# Altium PCB Sim548Z-v4.PcbDoc
Units mil, origin at the board's own origin, x right, y up, seen from the top; angles counter-clockwise.
Board outline 3100 x 1765 mil, 2 copper layers (Top Layer, Bottom Layer); 43 components, 0 nets, 252 pads, 53 vias.
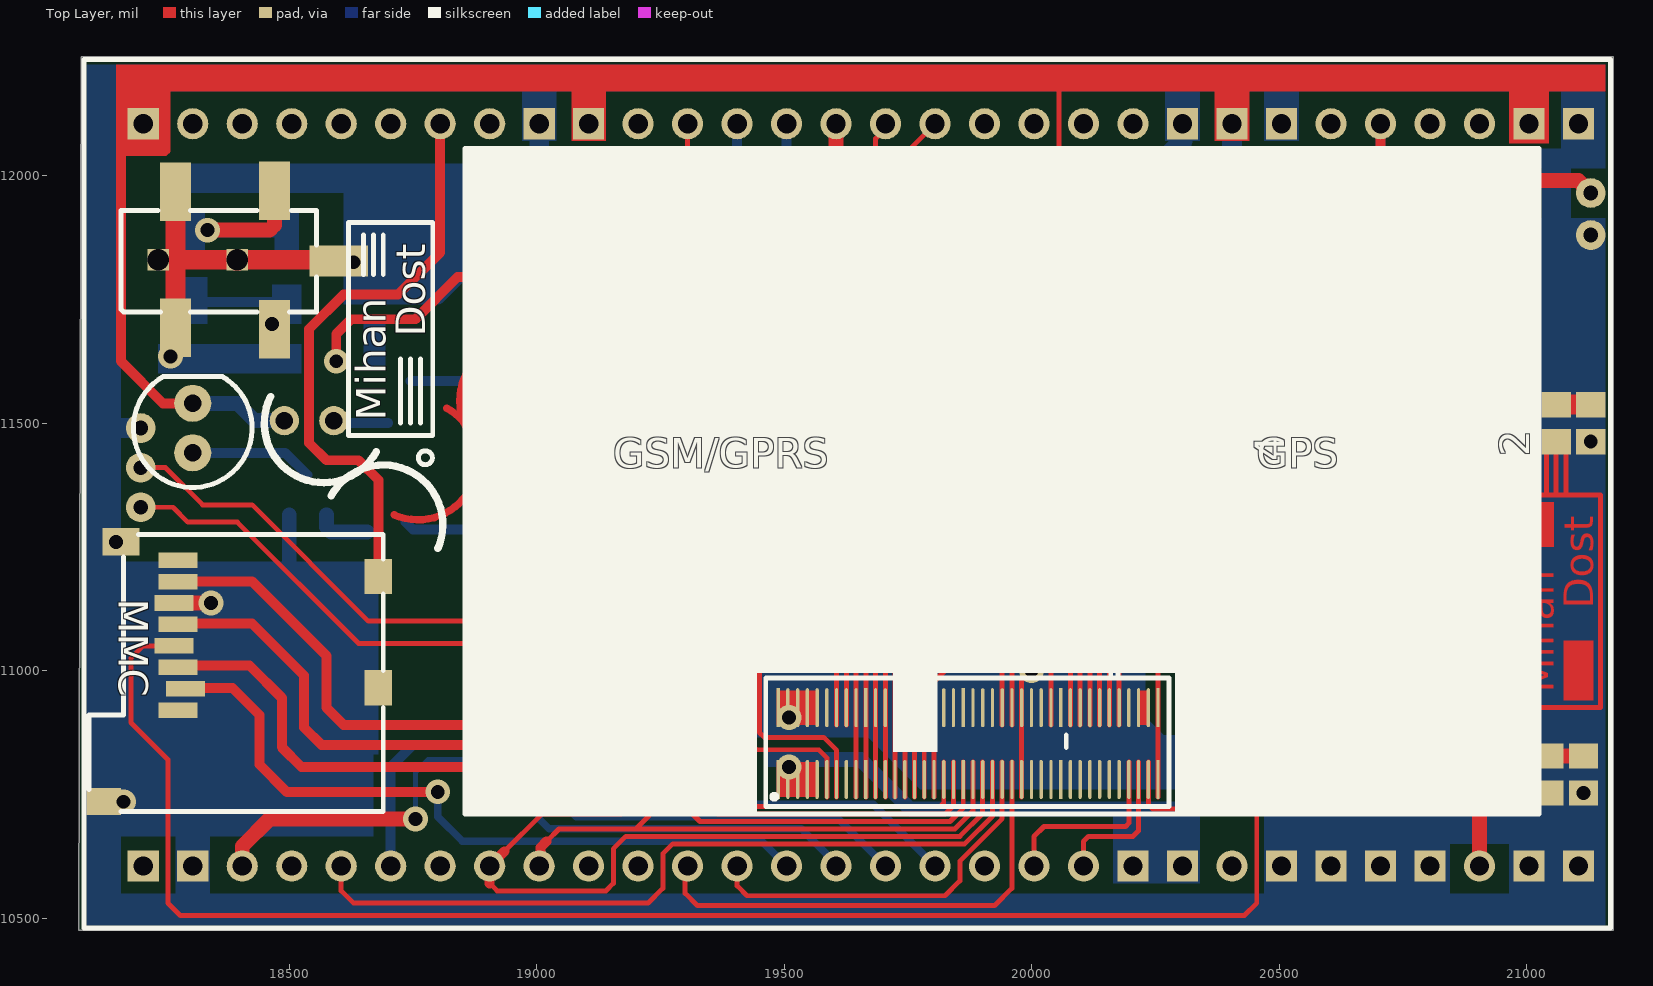
[diagram p0: Top Layer view]
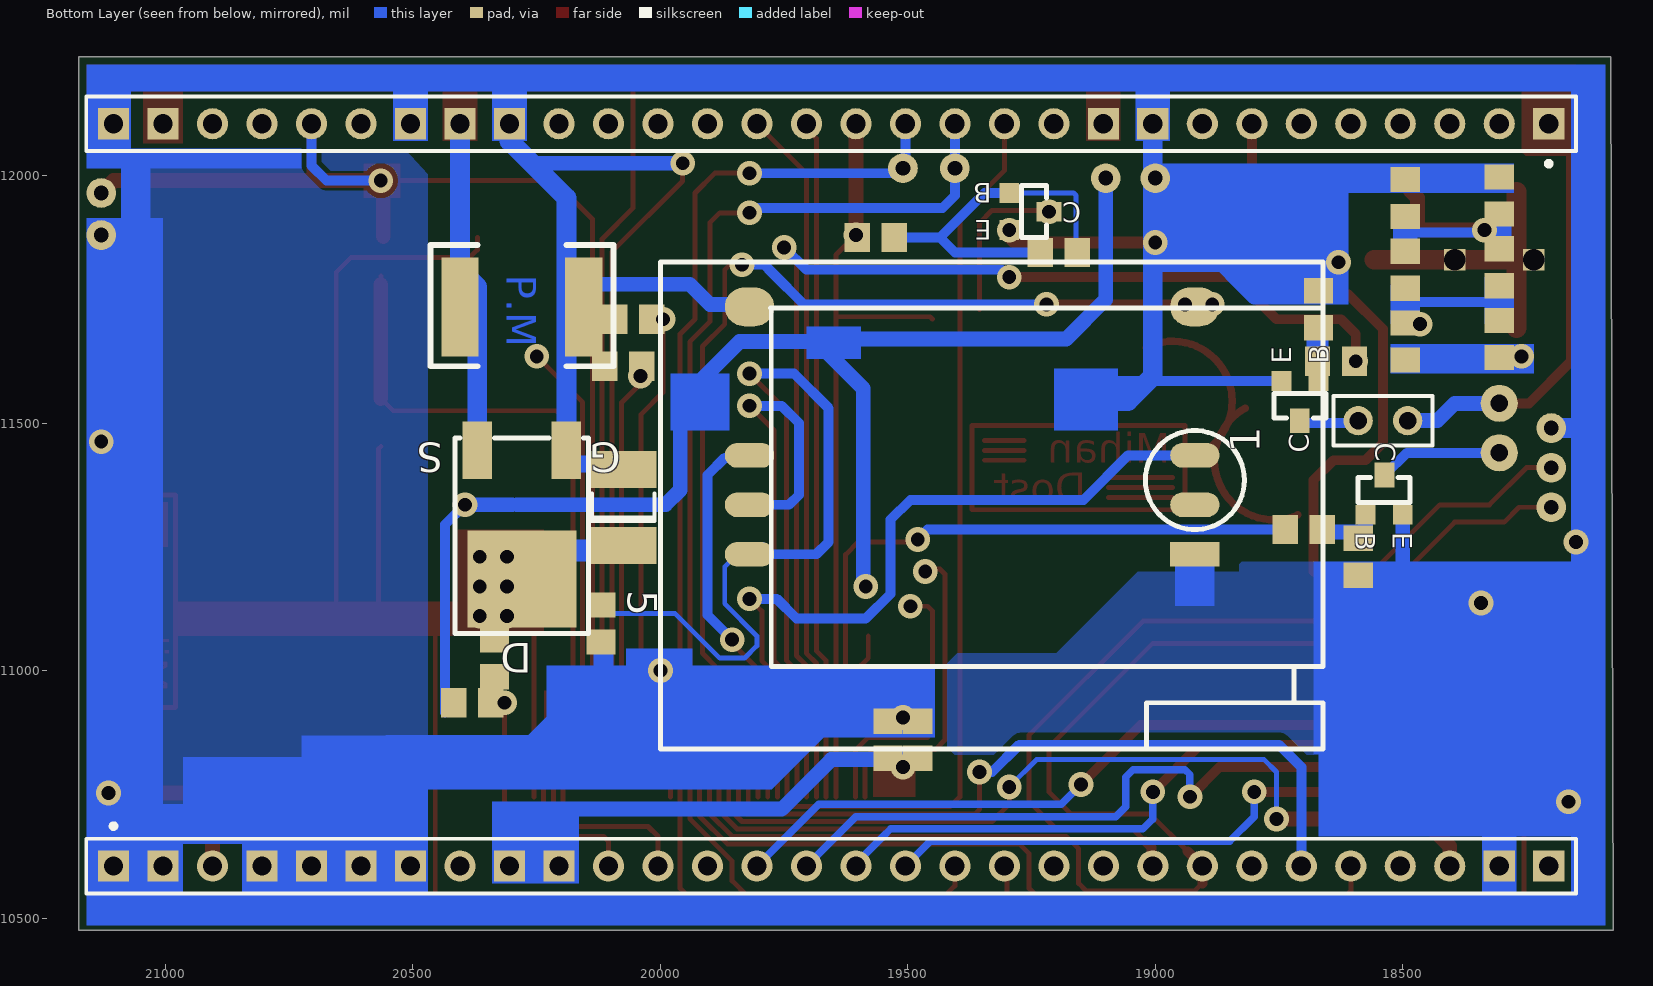
[diagram p1: Bottom Layer view, seen from below]

## Layer stack, top to bottom
Top Layer: signal copper 1.4
Dielectric: dielectric 12.6, FR-4, Dk 4.8
Bottom Layer: signal copper 1.4

## Board outline
18080,12240 21175,12240 21175,10475 18075,10475

## Design rules (kind name [scope] priority, off if disabled: settings)
Clearance [All] p1: gap=10
PolygonConnect [All] p1: connectstyle=Relief reliefconductorwidth=10 reliefentries=4 polygonreliefangle="90 Angle"
RoutingVias [All] p1: holewidth=28 width=50 viastyle="Through Hole" minholewidth=28 minwidth=50 maxholewidth=28 maxwidth=50
SilkscreenOverComponentPads [All] p1: minsilkscreentomaskgap=10
SolderMaskExpansion [All] p1: expansion=4
Width [All] p1: maxlimit=10 minlimit=10 preferedwidth=10
27 further rules are at their usual default settings.

## Components (designator, comment, footprint, x,y, rotation, side; value= is the part's Value field where it differs from the comment)
1 "Comment" SMD-tr 18670,11585 r90 bottom
2 "Comment" 2012[0805] 21060,11500 r270 top
4 "Comment" 2012[0805] 20565,11490 r90 top
5 "Comment" 2012[0805] 20120,11095 r90 bottom
HEADPHONE1 "" "Phone Jack" 18235,11830 r90 top
? "Comment" 2012[0805] 20370,11925 r90 top
? "Comment" SIM548Z 19890,11145 r0 top
? "Comment" "SIM card holder" 18900,11725 r0 bottom
? "Comment" 2012[0805] 18590,11230 r270 bottom
? "Comment" 2012[0805] 19575,11120 r90 top
? "Comment" 2012[0805] 20565,11835 r90 top
? "Comment" 2012[0805] 18700,11285 r180 bottom
? "Comment" SMD-tr 18575,11315 r270 bottom
? "Comment" 2012[0805] 18495,11955 r270 bottom
? "Comment" 2012[0805] 18495,11810 r270 bottom
? "Comment" 2012[0805] 18495,11665 r270 bottom
? "Comment" 2012[0805] 18305,11670 r270 bottom
? "Comment" 2012[0805] 18305,11815 r270 bottom
? "Comment" 2012[0805] 18305,11960 r270 bottom
? "Comment" 2012[0805] 21045,10790 r270 top
? "Comment" 2012[0805] 21115,10790 r270 top
? "Comment" 1812 20075,11330 r90 bottom
? "Comment" 2012[0805] 20055,11710 r180 bottom
? "Comment" 2012[0805] 20380,10935 r0 bottom
? "Comment" 2012[0805] 20335,11025 r270 bottom
? "Comment" 2012[0805] 20075,11615 r180 bottom
? "Comment" 2220 20155,11735 r0 bottom
? "Comment" 2012[0805] 19480,10860 r90 bottom
? "Comment" 2012[0805] 19540,10860 r90 bottom
? "Comment" LED1 18325,11450 r90 top
? "Comment" HDR1X30#1 21105,10605 r180 bottom
? "Comment" HDR1X30#2 18205,12105 r0 bottom
? "Comment" MicroSD 18275,10920 r90 top
? "Comment" DPAK 20290,11245 r0 bottom
? "Comment" 2012[0805] 18635,11625 r180 bottom
? "Comment" 2012[0805] 18670,11730 r270 bottom
? "Comment" HDR1X2 18490,11505 r0 bottom
? "Comment" 2012[0805] 21130,11500 r270 top
? "Comment" 2012[0805] 19565,11875 r180 bottom
? "Comment" SMD-tr 19295,11965 r0 bottom
? "Comment" 2012[0805] 19195,11845 r0 bottom
? "Comment" 3216[1206] 19395,11710 r180 top
? "Comment" "Arman Afzar" 21120,10945 r90 top

## Footprints (in the part's own frame and the unit in brackets; to place one, negate y for a bottom-side part, rotate by r counter-clockwise, add the part's x,y. Pads: shape width x height; smd on the part's side, far side on the other; paste and mask are expansions set on the pad)
1812 [mm] "Chip Capacitor; Body 4.5 x 3.2 mm (LxW typ)"
  rect 1.9x3.4 smd: 1(-1.95,0) 2(1.95,0)
  silkscreen extent -0.7,-1.6 0.7,1.6
2012[0805] [mm] "Chip Resistor; Body 2.0 x 1.3 mm (LxW typ)"
  rect 1.3x1.5 smd: 1(-0.95,0) 2(0.95,0)
2220 [mil]
  rect 75x200 smd: GND(0,0) VCC(250,0)
  silkscreen extent -60,-125 310,120
3216[1206] [mm] "Chip Resistor; Body 3.2 x 1.6 mm (LxW typ)"
  rect 1.6x1.8 smd: 1(-1.4,0) 2(1.4,0)
  silkscreen extent -0.3,-0.8 0.3,0.8
"Arman Afzar" [mil]
  Top Layer region: 304.91,64.98 304.91,124.71 394.71,124.71 394.71,64.98
  Top Layer region: -4.71,-14.71 -4.71,45 115,45 115,-14.71
  Top Layer lines w10: -20,140 -20,-30 410,-30 410,140 -20,140
DPAK [mil]
  rect 60x116 smd: 1(-100,-200) 3(80,-200)
  rect 220x196 smd: 2(-10,60)
  silkscreen extent -145,-225 125,170
HDR1X2 [mm] "Connector; Header; 2 Position"
  round 1.5 hole 0.9: 1(0,0) 2(2.54,0)
  silkscreen extent -1.27,-1.27 3.81,1.27
HDR1X30#1 [mm] "Connector; Header; 30 Position"
  round 1.6 hole 0.99: CTS(43.18,0) DCD(60.96,0) DSR(58.42,0) DTR(68.58,0) LED-POWER(5.08,0) MISO(33.02,0) MOSI(35.56,0) OC1B(25.4,0) OCO(30.48,0) OCR1A(27.94,0) RING(45.72,0) RST(17.78,0) RTS(63.5,0) RX(55.88,0) RXD(48.26,0) SCK(38.1,0) SS(40.64,0) TX(53.34,0) TXD(66.04,0) XCK(50.8,0)
  rect 1.6x1.6 hole 0.99: GND(0,0) GND(2.54,0) GND(7.62,0) GND(10.16,0) GND(12.7,0) GND(15.24,0) GND(71.12,0) VCC(20.32,0) VCC(22.86,0) VCC(73.66,0)
  silkscreen extent -1.4,-1.4 75.06,2.17
HDR1X30#2 [mm] "Connector; Header; 30 Position"
  rect 1.6x1.6 hole 0.99: ADC0(0,0) GND(20.32,0) GND(53.34,0) GND(58.42,0) GND(73.66,0) VCC(22.86,0) VCC(55.88,0) VCC(71.12,0)
  round 1.6 hole 0.99: ADC1(2.54,0) ADC2(5.08,0) ADC3(7.62,0) ADC4(10.16,0) ADC5(12.7,0) ADC6(15.24,0) ADC7(17.78,0) PA.3(43.18,0) PA.4(40.64,0) PA.5(38.1,0) PA.6(35.56,0) PC0(50.8,0) PC1(48.26,0) PC2(45.72,0) PC4(33.02,0) PC5(30.48,0) PC6(27.94,0) PC7(25.4,0) RXD(63.5,0) SCL(68.58,0) SDA(66.04,0) TXD(60.96,0)
  silkscreen extent -1.4,-1.4 75.06,2.17
LED1 [mil]
  round 75 hole 35: 1(-10,20) 2(90,20)
  silkscreen extent -80,-100 144,140
MicroSD [mm]
  rect 0.8x2 smd: 1(0,0) 2(1.1,-0.4) 3(2.2,0) 4(3.3,0.2) 5(4.4,0) 6(5.5,0.2) 7(6.6,0) 8(7.7,0)
  rect 1.4x1.9 smd: 9(8.643,2.918)
  rect 1.8x1.4 smd: 10(6.865,-10.29) 11(1.15,-10.29)
  rect 1.4x1.75 smd: 12(-4.692,3.807)
  silkscreen extent -5.21,-10.54 9.02,4.57
"Phone Jack" [mm]
  rect 1.1x1.1 hole 1.1: 0(0,0) 0(0,-4.064)
  rect 3x1.6 smd: 1(-3.492,-0.889) 2(-3.556,-5.969) 4(3.556,-5.969) 5(3.492,-0.889)
  rect 1.6x3 smd: 3(-0.064,-9.271)
  silkscreen extent -2.67,-8.13 2.54,1.91
SIM548Z [mm] "GSM&GPS"
  rect 0.17x2 smd: 1(-10.214,-9.271) 2(-10.214,-5.588) 19(-5.714,-9.271) 20(-5.714,-5.588) 39(-0.714,-9.271) 40(-0.714,-5.588) 59(4.286,-9.271) 60(4.286,-5.588) 79(9.286,-9.271) 80(9.286,-5.588)
  oval 0.17x2 smd: 3(-9.714,-9.271) 4(-9.714,-5.588) 5(-9.214,-9.271) 6(-9.214,-5.588) 7(-8.714,-9.271) 8(-8.714,-5.588) 9(-8.214,-9.271) 10(-8.214,-5.588) 11(-7.714,-9.271) 12(-7.714,-5.588) 13(-7.214,-9.271) 14(-7.214,-5.588) 15(-6.714,-9.271) 16(-6.714,-5.588) 17(-6.214,-9.271) 18(-6.214,-5.588) 21(-5.214,-9.271) 22(-5.214,-5.588) 23(-4.714,-9.271) 24(-4.714,-5.588) 25(-4.214,-9.271) 26(-4.214,-5.588) 27(-3.714,-9.271) 28(-3.714,-5.588) 29(-3.214,-9.271) 30(-3.214,-5.588) 31(-2.714,-9.271) 32(-2.714,-5.588) 33(-2.214,-9.271) 34(-2.214,-5.588) 35(-1.714,-9.271) 36(-1.714,-5.588) 37(-1.214,-9.271) 38(-1.214,-5.588) 41(-0.214,-9.271) 42(-0.214,-5.588) 43(0.286,-9.271) 44(0.286,-5.588) 45(0.786,-9.271) 46(0.786,-5.588) 47(1.286,-9.271) 48(1.286,-5.588) 49(1.786,-9.271) 50(1.786,-5.588) 51(2.286,-9.271) 52(2.286,-5.588) 53(2.786,-9.271) 54(2.786,-5.588) 55(3.286,-9.271) 56(3.286,-5.588) 57(3.786,-9.271) 58(3.786,-5.588) 61(4.786,-9.271) 62(4.786,-5.588) 63(5.286,-9.271) 64(5.286,-5.588) 65(5.786,-9.271) 66(5.786,-5.588) 67(6.286,-9.271) 68(6.286,-5.588) 69(6.786,-9.271) 70(6.786,-5.588) 71(7.286,-9.271) 72(7.286,-5.588) 73(7.786,-9.271) 74(7.786,-5.588) 75(8.286,-9.271) 76(8.286,-5.588) 77(8.786,-9.271) 78(8.786,-5.588)
  silkscreen extent -26.29,-11.05 28.83,23.11
"SIM card holder" [mil]
  oval 100x50 smd: 6(20,390) CLK(3)(920,290) DATA(7)(20,290) RST(2)(920,390) VDD(1)(920,490)
  oval 100x78.74 smd: GND(920,-10) LOCK(20,-10)
  rect 100x50 smd: GND(5)(20,490)
  silkscreen extent -239,-101 1100,884
SMD-tr [mil]
  rect 40x40 smd: 1(0,0) 2(0,75)
  rect 50x40 smd: 3(-80,38)
  silkscreen extent -75,-15 -25,90

## Part data
HEADPHONE1: library part "Header 5", "Header, 5-Pin"

## Free pads (board coordinates)
  round 60 hole 30: 0(18200,11410) 0(19000,11995) 0(19100,11995) 0(19405,12015) 1(18200,11330) 1(19510,12015) 1(21130,11965) 2(18200,11490) 2(21130,11880)

## Via types
v1: diameter 50, hole 28, Top Layer to Bottom Layer, 53 vias

## Nets (pads, with @x,y where several pads share a name; then routed paths per layer and width w, separated by ;. In a path a pad name is that pad's centre, name@x,y a point inside that pad or via, vN(x,y) a via of type N, cw(c..) or ccw(c..) an arc to the next point about the centre after c; other vN are vias at no path point)
pads on no net: 1.1 1.2 1.3 2.1 2.2 4.1 4.2 5.1 5.2 ?.1 ?.2 ?.3 ?.4 ?.5 ?.6 ?.7 ?.8 ?.9 ?.10 ?.11 ?.12 ?.13 ?.14 ?.15 ?.16 ?.17 ?.18 ?.19 ?.20 ?.21 ?.22 ?.23 ?.24 ?.25 ?.26 ?.27 ?.28 ?.29 ?.30 ?.31 ?.32 ?.33 ?.34 ?.35 ?.36 ?.37 ?.38 ?.39 ?.40 ?.41 ?.42 ?.43 ?.44 ?.45 ?.46 ?.47 ?.48 ?.49 ?.50 ?.51 ?.52 ?.53 ?.54 ?.55 ?.56 ?.57 ?.58 ?.59 ?.60 ?.61 ?.62 ?.63 ?.64 ?.65 ?.66 ?.67 ?.68 ?.69 ?.70 ?.71 ?.72 ?.73 ?.74 ?.75 ?.76 ?.77 ?.78 ?.79 ?.80 ?.ADC0 ?.ADC1 ?.ADC2 ?.ADC3 ?.ADC4 ?.ADC5 ?.ADC6 ?.ADC7 ?.CLK(3) ?.CTS ?.DATA(7) ?.DCD ?.DSR ?.DTR ?.GND ?.GND(5) ?.LED-POWER ?.LOCK ?.MISO ?.MOSI ?.OC1B ?.OCO ?.OCR1A ?.PA.3 ?.PA.4 ?.PA.5 ?.PA.6 ?.PC0 ?.PC1 ?.PC2 ?.PC4 ?.PC5 ?.PC6 ?.PC7 ?.RING ?.RST ?.RST(2) ?.RTS ?.RX ?.RXD ?.SCK ?.SCL ?.SDA ?.SS ?.TX ?.TXD ?.VCC ?.VDD(1) ?.XCK HEADPHONE1.0 HEADPHONE1.1 HEADPHONE1.2 HEADPHONE1.3 HEADPHONE1.4 HEADPHONE1.5
copper on no net: | length 75814.8
  Top Layer w10: 18160,12035 18170,12045 18200,12045 18250,12045 18255,12050 18255,12195 18260,12200 ; 18200,11330 18265,11330 18295,11300 18395,11300 18640,11055 19005,11055 19215,10845 19215,10755 19170,10710 19095,10710 19010,10710 18935,10635 ; 18200,11410 18250,11410 18325,11335 18425,11335 18660,11100 19025,11100 19255,10870 19255,10735 19200,10680 ; 18267.13,11049.92 18267.05,11050 18205,11050 18180,11025 18180,11020 18180,10895 18255,10820 18255,10530 18280,10505 20430,10505 20455,10530 20455,11110 ; 18280,11135 18281.54,11136.54 ; 18605,10605 18605,10555 18630,10530 19225,10530 19255,10560 19255,10630 19275,10650 19865,10650 19920.94,10705.94 19920.94,10815 ; 18705,10605 18710,10610 ; 18905,10570 18920,10555 19140,10555 19155,10570 19155,10640 19180,10665 19220,10665 19855,10665 19901.26,10711.26 19901.26,10815 ; 18965,11350 19095,11350 ; 18965,11370 19095,11370 ; 18965,11390 19095,11390 ; 19005,10605 19007.5,10607.5 ; 19020,10655 19045,10680 19845,10680 19881.58,10716.58 19881.58,10815 ; 19205,10605 19208.59,10608.59 ; v1(19215,11927) 19218,11930 19330,11930 19355,11905 19355,11730 ; 19265,11425 19345,11425 ; 19265,11445 19345,11445 ; 19265,11465 19345,11465 ; v1(19295,10765) 19295,10730 19330,10695 19835,10695 19861.89,10721.89 19861.89,10815 ; 19305,10605 19300,10600 19300,10550 19325,10525 19925,10525 19960,10560 19960,10635 19960,10655 19960,10675 19960,10815 ; 19305,12105 19305,12010 19395,11920 19395,11240 19395,10745 19415,10725 19815,10725 19822.52,10732.52 19822.52,10815 ; v1@19345,10795 19355,10785 19355,10720 19365,10710 19825,10710 19842.21,10727.2 19842.21,10815 ; 19405,10605 19405,10565 19425,10545 19825,10545 19855,10575 19855,10615 19940.63,10700.63 19940.63,10815 ; 19450.12,11710 19455.12,11715 19645,11715 ; v1@19460,11205 19435,11205 19425,11195 19425,10860 19445,10840 19570,10840 19586.3,10823.7 19586.3,10745 ; v1@19480,11270 19490,11260 19600,11260 19625.67,11234.33 19625.67,11009.33 19625.67,10890 ; v1(19495,11130) 19460,11130 19450,11120 19450,10875 19460,10865 19580,10865 19605.99,10839.01 19605.99,10745 ; 19580,11070 19580,11025 19605.99,10999.01 19605.99,10890 ; v1(19605,11880) 19645.35,11839.65 19645.35,10745 ; 19665.04,10745 19665.04,11020.04 19685,11040 19685,12075 19703.75,12093.75 19703.75,12105 ; 19684.72,10745 19684.72,11014.73 19705,11035 19705,12005 19805,12105 ; 19704.41,10745 19704.41,11009.41 19725,11030 19725,11830 v1(19750,11855) ; 19724.1,10745 19724.1,10999.09 19745,11020 19745,11525 v1(19820,11600) ; 19743.78,10745 19743.78,10993.78 19770,11020 19770,11485 v1(19820,11535) ; 19763.47,10745 19763.47,10988.47 19795,11020 19795,11120 v1(19820,11145) ; 19783.15,10745 19783.15,10983.15 19825,11025 v1@19855,11055 ; 19802.83,10745 19802.83,10977.83 19830,11005 19885,11005 19915,11035 19915,11655 19870,11700 19870,11810 19860,11820 v1(19835,11820) ; v1(19820,11925) 19880,11925 19900,11905 19900,11705 19940.63,11664.37 19940.63,10890 ; v1(19820,12005) 19890,12005 19930,11965 19930,11845 19930,11710 19960.31,11679.68 19960.31,10890 ; v1(19855,11062.5) v1@19855,11055 ; v1@19855,11070 v1@19855,11055 ; v1(19955,12025) 19955,11989.24 20098.11,11846.13 20098.11,10890 ; 19980,10745 19980,10960 19980,10980 v1(20000,11000) ; v1(19995,11710) 19995,11655 19995,11561.92 20039.06,11517.87 20039.06,10890 ; 20005,10605 20005,10665 20025,10685 20115,10685 ; v1(20040,11595) 20040,11580 20078.42,11541.58 20078.42,10890 ; 20055,12195 20055,12000 20055,11935 20117.79,11872.2 20117.79,10890 ; 20105,10605 20105,10655 20115,10665 20135,10665 20205,10665 20215,10675 20216.22,10676.22 20216.22,10815 ; 20105,10685 20190,10685 20196.53,10691.53 20196.53,10815 ; 20137.48,10890 20137.48,11387.48 20137.48,11912.48 20215,11990 v1(20565,11990) ; 20157.17,10890 20157.17,11362.17 20157.17,11542.17 v1(20250,11635) ; 20176.85,10890 20176.85,11491.85 20210,11525 20540,11525 20565,11550 ; 20235.9,10815 20235.9,10729.09 20245,10720 20300,10720 20315,10735 v1(20315,10935) ; 20255.59,10745 20255.59,11085.59 20280,11110 ; 20370,11875 20370,11850 20385,11835 20625,11835 20655,11805 20655,11115 20660,11110 ; 20560,11877.4 20565,11872.4 ; 20565,11452.6 20570,11447.6 20570,11110 ; 20565,11780 20565,11797.6 ; 21040,11355 21040,11445 ; 21060,11355 21060,11462.6 ; 21075,11445 21080,11440 21080,11360 ; 18505,10605 18507.19,10607.19 18505,10605 ; 18909.14,11335 ccw(c18895,11335) 18909.14,11335 ; 18940,11325 19370,11325 19370,11495 18940,11495 18940,11325 ; 20980,10925 21150,10925 21150,11355 20980,11355 20980,10925
  Top Layer w15: 18711.99,11314.57 ccw(c18760,11425) 18818.48,11530.26 ; 18906.97,11439.49 cw(c18965,11545) 19018.85,11652.7
  Top Layer w20: 18160,12035 18160,12190 ; 18160,12045 18160,11625 18245,11540 18330,11540 ; 18275,11010 18420,11010 18485,10945 18485,10845 18525,10805 18870,10805 v1(18930,10745) ; 18275,11095 18425,11095 18530,10990 18530,10885 18565,10850 18910,10850 v1(19005,10755) ; 18275,11179.84 18425.16,11179.84 18575,11030 18575,10925 18610,10890 19030,10890 v1(19150,10770) ; 18290.75,10965 18385,10965 18440,10910 18440,10810 18495,10755 v1(18800,10755) ; v1(18595,11625) 18595,11680 18625,11710 18755,11710 18840,11795 v1(19295,11795) ; 18680,11200 18680,11385 18640,11425 18575,11425 18540,11460 18540,11690 18610,11760 18720,11760 18805,11845 18805,12105 ; v1(18885,11740) v1(19220,11740) ; 18905,10570 18905,10605 18935,10635 ; 19007.5,10607.5 19007.5,10642.5 19020,10655 ; v1@20560,11990 20665,11990 ; 20705,11990 20705,12105
  Top Layer w25: v1(19000,11865) 19285,11865 19295,11875 v1(19295,11890)
  Top Layer w30: 18281.54,11136.54 v1(18342.13,11136.54) ; v1(18335,11890) 18460,11890 18470,11900 18470,11955 18485,11970 ; 18405,10605 18405,10645 18460,10700 v1(18755,10700) ; v1(19605,11880) 19605,11985 19605,12105 ; 20435,11110 20280,11110 20660,11110 ; 20560,11877.4 20560,11990 20900,11990 21105,11990 21130,11965 ; 20565,11550 20565,11780 ; 20905,10605 20905,10715 20942.6,10752.6 21045,10752.6 ; 21045,10827.4 21115,10827.4
  Top Layer w40: 18235,11830 18392.48,11830 18395,11827.48 ; 18270,11692.52 18270,11967.48 ; 18400,11830 18557.48,11830 ; 21060,11537.4 21130,11537.4
  Bottom Layer w10: 18590,11505 18595,11500 ; 18657.6,11280 18662.6,11285 ; 18670,11767.4 18672.4,11765 ; v1(18755,10700) 18755,10795 18780,10820 18885,10820 19240,10820 v1(19295,10765) ; 18840,11825 18850,11835 ; 18895,11235 18900,11240 ; 19157.6,11845 19160,11847.4 19160,11960 19165,11965 19295,11965 ; 19180,11670 19235,11670 ; 19435,11875 19475,11875 ; v1@19510,10900 v1@19515,10895 ; v1(19585,11170) v1@19590,11175 ; 19605,10605 19605,10610 ; 19645,11670 19667.5,11647.5 ; 19705,12105 19710,12100 ; 19820,11435 19825,11430 ; 19845,11235 19870,11210 19870,11135 19805,11070 19805,11050 19830,11025 19880,11025 19970,11115 20100,11115 ; 20115,11052.6 20120,11057.6 ; 20185,11115 20195,11105
  Bottom Layer w15: v1(18800,10755) 18800,10705 18850,10655 19005,10655 19370,10655 19455,10655 19505,10605 ; v1(18930,10745) 18930,10790 18940,10800 19045,10800 19060,10785 19060,10725 19080,10705 19115,10705 19605,10705 19705,10605 ; v1(19005,10755) 19005,10700 19025,10680 19535,10680 19550,10665 19570,10645 19605,10610 ; v1(19150,10770) 19190,10730 19485,10730 19680,10730 19805,10605
  Bottom Layer w20: 18305,11440 18492,11440 18537,11395 ; 18595,11500 18700,11500 ; 18705,10605 18705,10805 18750,10850 19275,10850 19330,10795 v1(19355,10795) ; 18735,11300 18750,11285 19460,11285 v1(19480,11265) ; 18745,11585 19110,11585 ; 18920,11435 19055,11435 19145,11345 19495,11345 19535,11305 19535,11155 19585,11105 19725,11105 19765,11145 v1(19820,11145) ; v1(19220,11740) 19395,11740 19710,11740 19775,11805 19790,11820 v1(19835,11820) ; 19232.4,11845 19405,11845 19435,11875 ; v1(19295,11795) 19310,11810 19705,11810 v1(19750,11855) ; 19295,11965 19345,11965 19435,11875 ; 19405,12105 19405,11960 19430,11935 19810,11935 v1(19820,11925) ; 19505,12105 19505,12020 19520,12005 v1(19820,12005) ; 19527.6,11875 19435,11875 ; 19820,11335 19740,11335 19720,11355 19720,11500 19755,11535 v1(19820,11535) ; v1(19820,11600) 19730,11600 19660,11530 19660,11260 19685,11235 19845,11235 ; 19825,11430 19870,11430 19905,11395 19905,11200 19905,11112.5 v1@19852.5,11060 ; v1(20315,10935) 20335,10955 20335,10987.6 ; v1(20395,11335) 20435,11295 20435,11165 20435,10915 ; v1(20565,11990) 20675,11990 20705,12020 20705,12105
  Bottom Layer w30: 18310,11540 18395,11540 18430,11505 18490,11505 ; 18500,11165 18500,11315 ; 18575,11315 18575,11290 18585,11280 18657.6,11280 ; v1(18630,11825) 18840,11825 ; 18760,11755 18800,11755 18895,11850 v1@18995,11850 ; 19100,11995 19100,11750 19180,11670 19645,11670 ; v1@19510,10820 19655,10820 19755,10720 20180,10720 20185,10715 ; v1@19515,10895 20145,10895 ; v1@19590,11175 19590,11570 19667.5,11647.5 ; 19650,11665 19840,11665 19935,11570 ; 19790,11740 19900,11740 19940.62,11780.62 20155,11780.62 ; v1(19955,12025) 20250,12025 ; 19960,11545 19960,11365 19990,11335 20290,11335 ; 20000,10895 v1(20000,11000) ; 20135,10895 20220,10895 20330,10785 20675,10785 ; 20205,10605 20205,10675 ; 20300,11335 v1(20395,11335)
  Bottom Layer w40: 19005,12105 19005,11595 19055,11545 19150,11545 ; 20115,10955 20115,11052.6 ; 20190,11445 20190,11955 20305,12070 20305,12105 ; 20370,11445 20370,11775 20405,11810 20405,12105
  other v1: 18165,10735 21115,10752.6 19510,10805 19510,10905 20310,11110 20365,11110 20310,11170 20365,11170 19465,11200 20310,11230 20365,11230 18150,11260 21130,11462.6 18260,11635 18465,11700 18940,11740

## Polygon pours and split planes (outlines as drawn)
no net on Bottom Layer "Top Layer-No Net" (solid, pour order 6): 18670,11220 18825,11220 18830,11215 18830,11205 18835,11200 18935,11200 19025,11200 19035,11200 19200,11035 19400,11035 19420,11015 19420,10845 19405,10830 18670,10830
no net on Bottom Layer "Top Layer-No Net" (solid, pour order 2): 20515.35,12052.04 21055,12052.04 21055,11457.96 21055,10692.04 20674.07,10692.04 20669.53,10696.95 20524.42,10696.95 20506.28,10716.59 20506.28,10829.51 20470,10868.79 20470,12002.94 20515.35,12052.04

## Other copper
Top Layer:
  rectangle: 20235,11070 20410,11285
  rectangle: 20235,11070 20980,11140
  rectangle: 18170,12050 18255,12185
  rectangle: 18160,12045 18250,12060
  rectangle: 18150,12150 18260,12185
  rectangle: 20215,10890 20235,10960
  rectangle: 19485,10745 19570,10815
  rectangle: 19485,10890 19565,10960
  rectangle: 19070,12070 19140,12195
  rectangle: 18150,12170 21160,12225
  rectangle: 20965,12065 21045,12225
  rectangle: 20370,12070 20440,12205
  rectangle: 20525,11955 20600,12025
  text "Mihan" at 18970,11420 h60
  text "Dost" at 19140,11340 h60
  text "Dost" at 21135,11125 h60 r90
  text "Mihan" at 21055,10955 h60 r90
Bottom Layer:
  rectangle: 19040,11560 19120,11585
  rectangle: 20165,10570 20340,10735
  rectangle: 19595,11630 19705,11695
  rectangle: 18880,11130 18960,11255
  rectangle: 18090,10485 18160,12225
  rectangle: 18610,11865 19020,12005
  rectangle: 19790,10760 20555,10870
  rectangle: 19445,10865 20230,11010
  rectangle: 18655,10830 18680.2,11220
  rectangle: 18150,10665 18260,11220
  rectangle: 18150,10725 18670,11220
  rectangle: 18305,11735 18520,11755
  rectangle: 18285,11875 18500,11895
  rectangle: 18280,11835 18330,11935
  rectangle: 18470,11830 18520,11935
  rectangle: 18465,11700 18525,11780
  rectangle: 18275,11700 18335,11795
  rectangle: 18235,11600 18525,11660
  rectangle: 18275,11965 19005,12025
  rectangle: 18650,11610 18695,11700
  rectangle: 18800,11795 18840,11825
  rectangle: 18685,11765 18820,11805
  rectangle: 18670,11740 18785,11767.4
  rectangle: 18610,11740 18785,11745
  rectangle: 18835,11805 19000,11860
  rectangle: 18610,11850 18995,11865
  rectangle: 18675,11825 18850,11850
  rectangle: 18645,11780 18805,11820
  rectangle: 18695,11745 18700,11765
  rectangle: 18610,11745 18700,11850
  rectangle: 20170,10570 20340,10640
  rectangle: 20800,10650 20990,10700
  rectangle: 20965,10505 21120,10715
  rectangle: 20470,10510 20845,10755
  rectangle: 20665,10690 20965,10825
  rectangle: 20470,10690 20725,10868.79
  rectangle: 20945,10690 21100,10730
  rectangle: 19790,11220 19845,11260
  rectangle: 20120,11220 20215,11265
  rectangle: 20125,11400 20190,11435
  rectangle: 19075,11485 19205,11610
  rectangle: 19860,11485 19980,11600
  rectangle: 19465,10805 19540,10840
  rectangle: 19480,10880 19545,10915
  rectangle: 20470,12070 20540,12185
  rectangle: 18970,12070 19040,12185
  rectangle: 18150,12170 21160,12225
  rectangle: 21070,12015 21160,12215
  rectangle: 20270,12070 20340,12205
  rectangle: 21030,10705 21090,12045
  rectangle: 18090,10485 21160,10550
  rectangle: 18270,10510 18340,10725
  rectangle: 18155,10665 18670,10730
  rectangle: 20725,12015 21160,12055
  rectangle: 21005,10540 21160,11915
  rectangle: 18115,11470 18220,11510
  rectangle: 19935,10990 20070,11045
  region: 19670,10865 19775,10760 19875,10760 19890,10775 19890,10880
  text "P.M" at 20310,11800 h60 r90

## Silkscreen, mask and mechanical layers (free items; w line width, h text height)
Top Overlay:
  circle w10: c18775,11430 r14.14
  rectangle: 18855,10705 19445,11120
  rectangle: 20290,10710 21025,11125
  rectangle: 20500,11795 21025,12055
  rectangle: 19720,10835 19810,11005
  rectangle: 18855,10995 21030,12055
  lines w10: 18650,11800 18650,11880 ; 18670,11800 18670,11880 ; 18690,11800 18690,11880 ; 18725,11500 18725,11630 ; 18745,11500 18745,11630 ; 18765,11500 18765,11630 ; 20070,10845 20070,10870 ; 20330,11990 19005,11990 ; 19005,11990 19000,11995 19005,11990 ; 18085,10480 18085,12235 21170,12235 21170,12115 21170,10480 18085,10480 ; 18620,11475 18620,11905 18790,11905 18790,11475 18620,11475
  lines w15: 18462.3,11553.85 ccw(c18570,11500) 18675.51,11441.97 ; 18584.74,11353.48 cw(c18690,11295) 18800.43,11246.99
  text "Dost" at 18775,11675 h60 r90
  text "Mihan" at 18695,11505 h60 r90
  text "MMC" at 18155,11145 h60 r270

## Text inside footprints (layer, text, board x,y; h text height)
1: Bottom Overlay "C" at 18690,11440 h40 r270; Bottom Overlay "E" at 18725,11620 h40 r270; Bottom Overlay "B" at 18650,11620 h40 r270
?: Bottom Overlay "C" at 18555,11460 h40 r90; Bottom Overlay "E" at 18520,11280 h40 r90; Bottom Overlay "B" at 18595,11280 h40 r90
?: Bottom Overlay "S" at 20440,11460 h60 r180; Bottom Overlay "G" at 20080,11460 h60 r180; Bottom Overlay "D" at 20260,11055 h60 r180
?: Bottom Overlay "C" at 19150,11945 h40 r180; Bottom Overlay "E" at 19330,11910 h40 r180; Bottom Overlay "B" at 19330,11985 h40 r180
?: Top Overlay "GPS" at 20455,11410 h60; Top Overlay "GSM/GPRS" at 19155,11410 h60